# EAGLE board main3 (EAGLE 9.0.0)
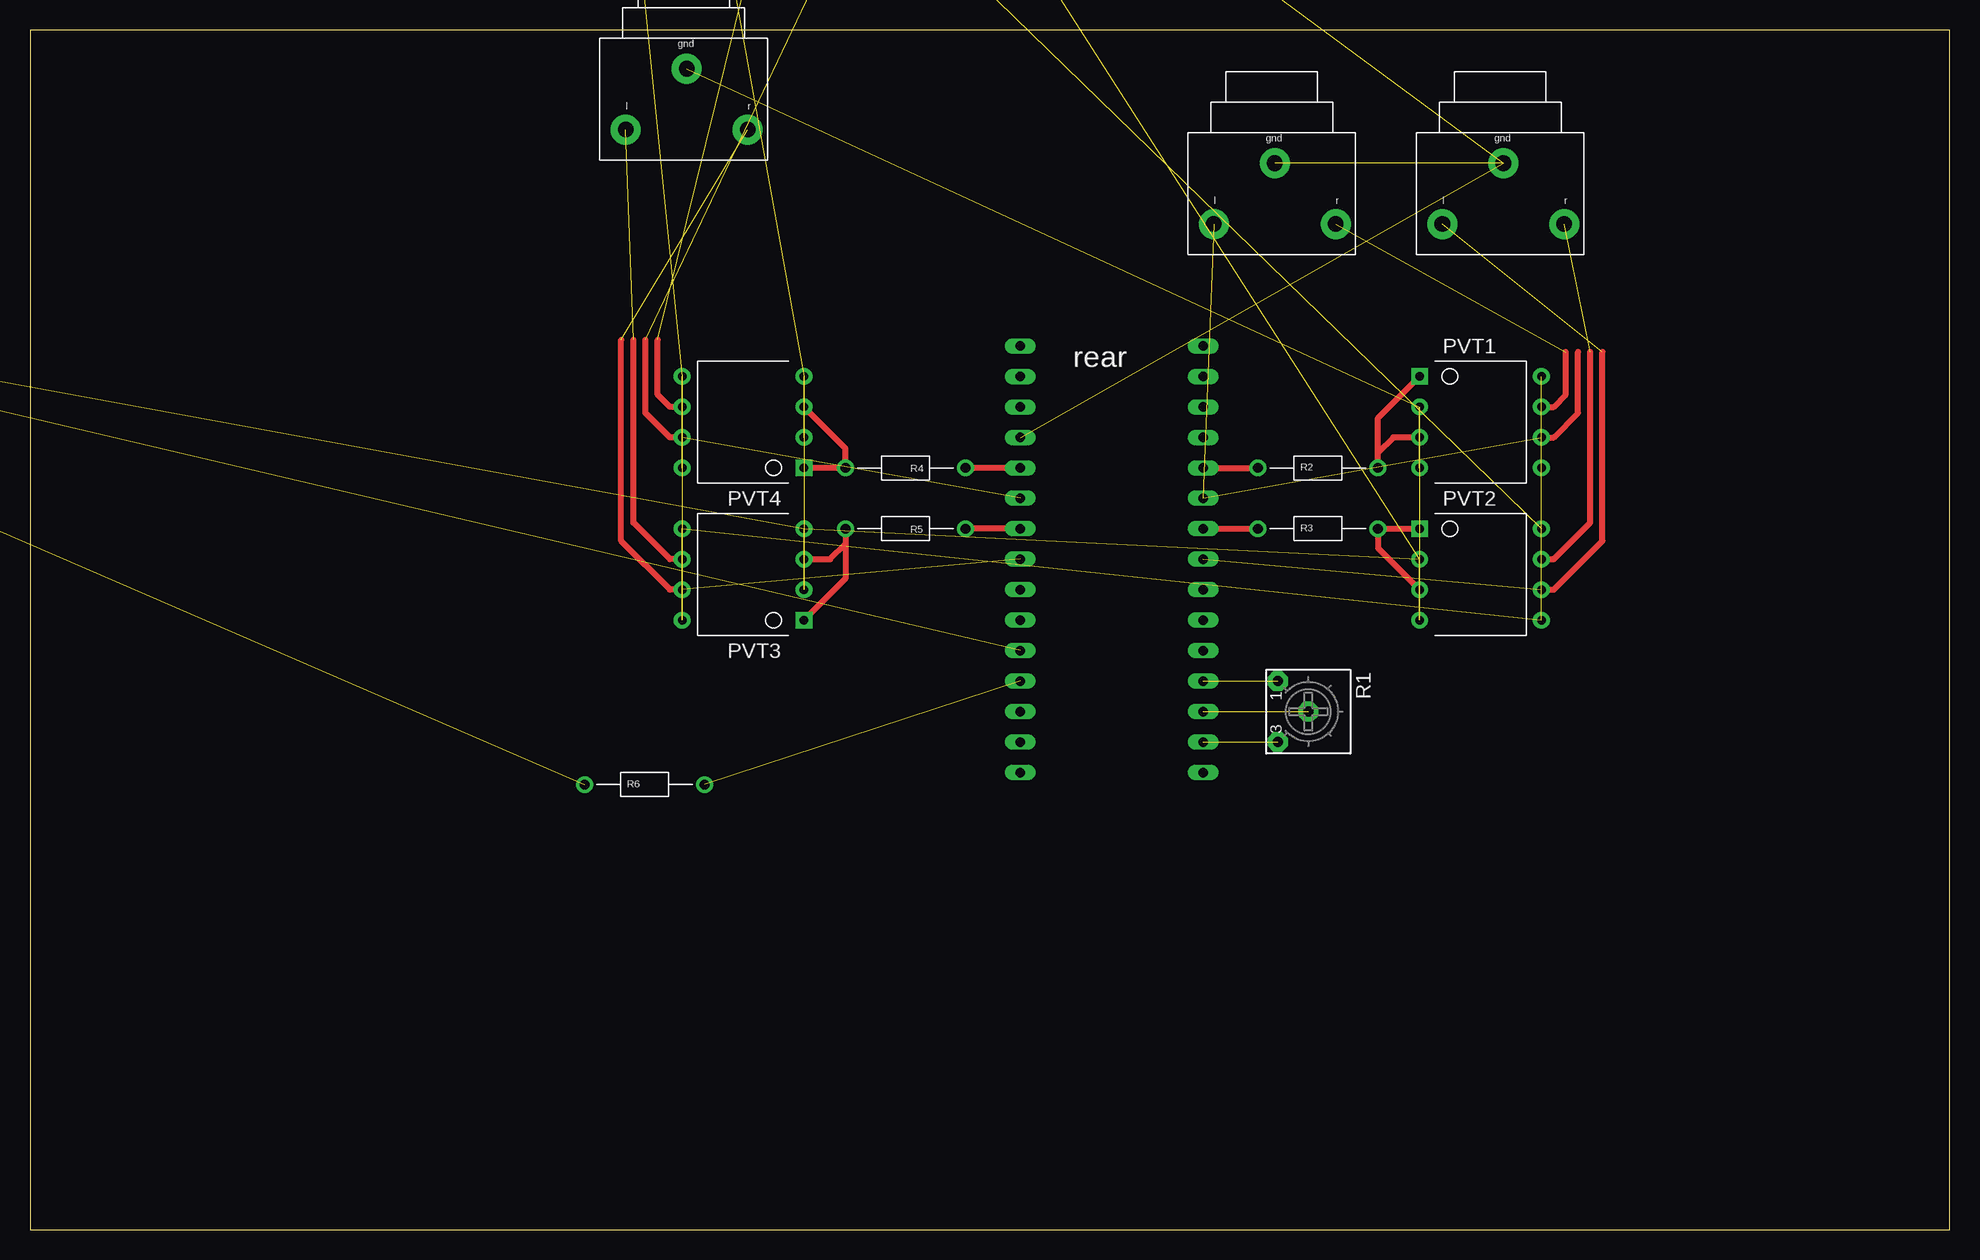
[diagram p0: board, top side]

Size 160 x 100 mm. Coordinates in mm from the lower left corner, seen from the top.
Outline: 0,0 160,0 160,100 0,100 0,0
Copper layers (1*16): Top 0.035mm / dielectric 1.5mm / Bottom 0.035mm
Design rules "default": minimum track width 6mil, minimum drill 0.35mm, track to track 6mil, track to pad 6mil, pad to pad 6mil, via to via 6mil, smd to smd 6mil, copper to edge 40mil, drill to drill 6mil, minimum pad ring 10mil, minimum via ring 8mil, stop-mask expansion 4mil, vias tented up to drill 0mil, thermal gap 10mil

## Footprints (pad centres in the part's own frame; a part is rotated, then mirrored left to right if it is on the bottom)
MINIJACKF = drill 1.3 pad 2.5: GND 7.24,5.08; LEFT 2.16,0; RIGHT 12.32,0
DIP-8 = drill 0.711 pad 1.397 square: 1 -2.54,-5.08 | drill 0.711 pad 1.397: 2 0,-5.08; 3 2.54,-5.08; 4 5.08,-5.08; 5 5.08,5.08; 6 2.54,5.08; 7 0,5.08; 8 -2.54,5.08
3362H = drill 0.813 pad 1.676 octagon: 1 -2.54,-3.175; 2 0,-0.635; 3 2.54,-3.175
CF-25(C1-4) = drill 0.813 pad 1.397: P$1 0,0; P$2 10,0
NANO = drill 0.8 long: 3.3V -10.16,24.13; 5V -10.16,-1.27; A0 -10.16,19.05; A1 -10.16,16.51; A2 -10.16,13.97; A3 -10.16,11.43; A4 -10.16,8.89; A5 -10.16,6.35; A6 -10.16,3.81; A7 -10.16,1.27; AREF -10.16,21.59; D2 5.08,1.27; D3 5.08,3.81; D4 5.08,6.35; D5 5.08,8.89; D6 5.08,11.43; D7 5.08,13.97; D8 5.08,16.51; D9 5.08,19.05; D10 5.08,21.59; D11 5.08,24.13; D12 5.08,26.67; D13 -10.16,26.67; GND -10.16,-6.35; GND1 5.08,-1.27; RAW -10.16,-8.89; RST -10.16,-3.81; RST1 5.08,-3.81; RX1 5.08,-6.35; TX0 5.08,-8.89
2PIN = drill 0.813 pad 1.397 square: P$1 0,0; P$2 2.5,0

## Placement (x,y rotation side)
MJ1  MINIJACKF  [MINIJACKF]  115.57,83.82 0 top
MJ2  MINIJACKF  [MINIJACKF]  96.52,83.82 0 top
MJ3  MINIJACKF  [MINIJACKF]  47.5,91.69 0 top
MJ4  MINIJACKF  [MINIJACKF]  62.23,123.19 0 top  (outside the outline)
MJ5  MINIJACKF  [MINIJACKF]  46.99,123.19 0 top  (outside the outline)
PVT1  PVT322A  [DIP-8]  120.9,68.58 270 top
PVT2  PVT322A  [DIP-8]  120.9,55.88 270 top
PVT3  PVT322A  [DIP-8]  59.44,53.34 90 top
PVT4  PVT322A  [DIP-8]  59.44,66.04 90 top
R1  [3362H]  107.19,43.18 270 top
R2  CF-25(C1-4)  [CF-25(C1-4)]  102.36,63.5 0 top
R3  CF-25(C1-4)  [CF-25(C1-4)]  102.36,58.42 0 top
R4  CF-25(C1-4)  [CF-25(C1-4)]  77.98,63.5 180 top
R5  CF-25(C1-4)  [CF-25(C1-4)]  77.98,58.42 180 top
R6  CF-25(C1-4)  [CF-25(C1-4)]  46.23,37.08 0 top
U$1  NANO  [NANO]  87.63,64.77 180 top
U$2  2PINCONNECTOR  [2PIN]  -41.91,77.47 0 top  (outside the outline)
U$3  2PINCONNECTOR  [2PIN]  -46.99,77.47 0 top  (outside the outline)

## Library data of the parts
MJ1-MJ5 = MiniJack
PVT1-PVT4 = PVT322
R1 = bourns
R2-R6 U$2 U$3 = resistance
U$1 = Arduino-clone

## Nets
N$1: R1.3 U$1.3.3V
N$2: R1.2 U$1.AREF
N$3: R1.1 U$1.A0
N$4: MJ1.LEFT PVT2.6 U$1.A4
N$5: PVT2.1 PVT2.3 R3.P$2
N$6: PVT1.1 PVT1.3 R2.P$2
N$7: R2.P$1 U$1.A7
N$8: R3.P$1 U$1.A5
N$9: R5.P$1 U$1.D4
N$10: R4.P$1 U$1.D2
N$11: MJ1.RIGHT PVT2.7
N$12: PVT3.1 PVT3.3 R5.P$2
N$13: PVT4.1 PVT4.3 R4.P$2
N$14: U$1.D8 U$2.P$1
N$15: MJ2.LEFT PVT1.6 U$1.A6
N$16: MJ2.RIGHT PVT1.7
N$17: R6.P$2 U$1.D9
N$18: MJ5.RIGHT PVT1.8 PVT2.8
N$19: MJ4.LEFT PVT4.6
N$20: MJ4.RIGHT PVT4.7 U$1.D3
N$21: MJ3.LEFT PVT3.6
N$22: MJ3.RIGHT PVT3.7 U$1.D5
N$23: R6.P$1 U$3.P$1
N$24: MJ5.LEFT PVT1.5 PVT2.5 PVT3.5 PVT3.8 PVT4.5 PVT4.8
N$25: MJ1.GND MJ2.GND MJ3.GND MJ4.GND MJ5.GND PVT1.2 PVT1.4 PVT2.2 PVT2.4 PVT3.2 PVT3.4 PVT4.2 PVT4.4 U$1.GND1 U$2.P$2 U$3.P$2

## Tracks (layer width: path | path; a pad name or v marks a point on that pad's centre or on a via)
N$1  (1 unrouted)
N$2  (1 unrouted)
N$3  (1 unrouted)
N$4  (2 unrouted)
  Top 0.508: PVT2.6 127,53.34 131.06,57.4 131.06,73.15
N$5
  Top 0.508: PVT2.3 112.36,56.8 R3.P$2 PVT2.1
N$6
  Top 0.508: R2.P$2 112.36,64.77 | 112.36,64.77 112.36,67.66 PVT1.1 | PVT1.3 113.63,66.04 112.36,64.77
N$7
  Top 0.508: U$1.A7 R2.P$1
N$8
  Top 0.508: U$1.A5 R3.P$1
N$9
  Top 0.508: U$1.D4 R5.P$1
N$10
  Top 0.508: U$1.D2 R4.P$1
N$11  (1 unrouted)
  Top 0.508: PVT2.7 127,55.88 130.05,58.93 130.05,73.15
N$12
  Top 0.508: R5.P$2 67.98,57.15 | 67.98,57.15 67.98,54.26 PVT3.1 | PVT3.3 66.71,55.88 67.98,57.15
N$13
  Top 0.508: PVT4.1 R4.P$2 67.98,65.12 PVT4.3
N$14  (1 unrouted)
N$15  (2 unrouted)
  Top 0.508: PVT1.6 127,66.04 129.03,68.07 129.03,73.15
N$16  (1 unrouted)
  Top 0.508: PVT1.7 127,68.58 128.02,69.6 128.02,73.15
N$17  (1 unrouted)
N$18  (2 unrouted)
N$19  (1 unrouted)
  Top 0.508: PVT4.6 53.34,68.58 52.32,69.6 52.32,74.17
N$20  (2 unrouted)
  Top 0.508: PVT4.7 53.34,66.04 51.31,68.07 51.31,74.17
N$21  (1 unrouted)
  Top 0.508: PVT3.6 53.34,55.88 50.29,58.93 50.29,74.17
N$22  (2 unrouted)
  Top 0.508: PVT3.7 53.34,53.34 49.28,57.4 49.28,74.17
N$23  (1 unrouted)
N$24  (6 unrouted)
N$25  (15 unrouted)